# Altium PCB PCB4test.PcbDoc
Units mil, origin at the board's own origin, x right, y up, seen from the top; angles counter-clockwise.
Board outline 3937 x 3937 mil, 2 copper layers (Top Layer, Bottom Layer); 29 components, 33 nets, 121 pads, 0 vias.
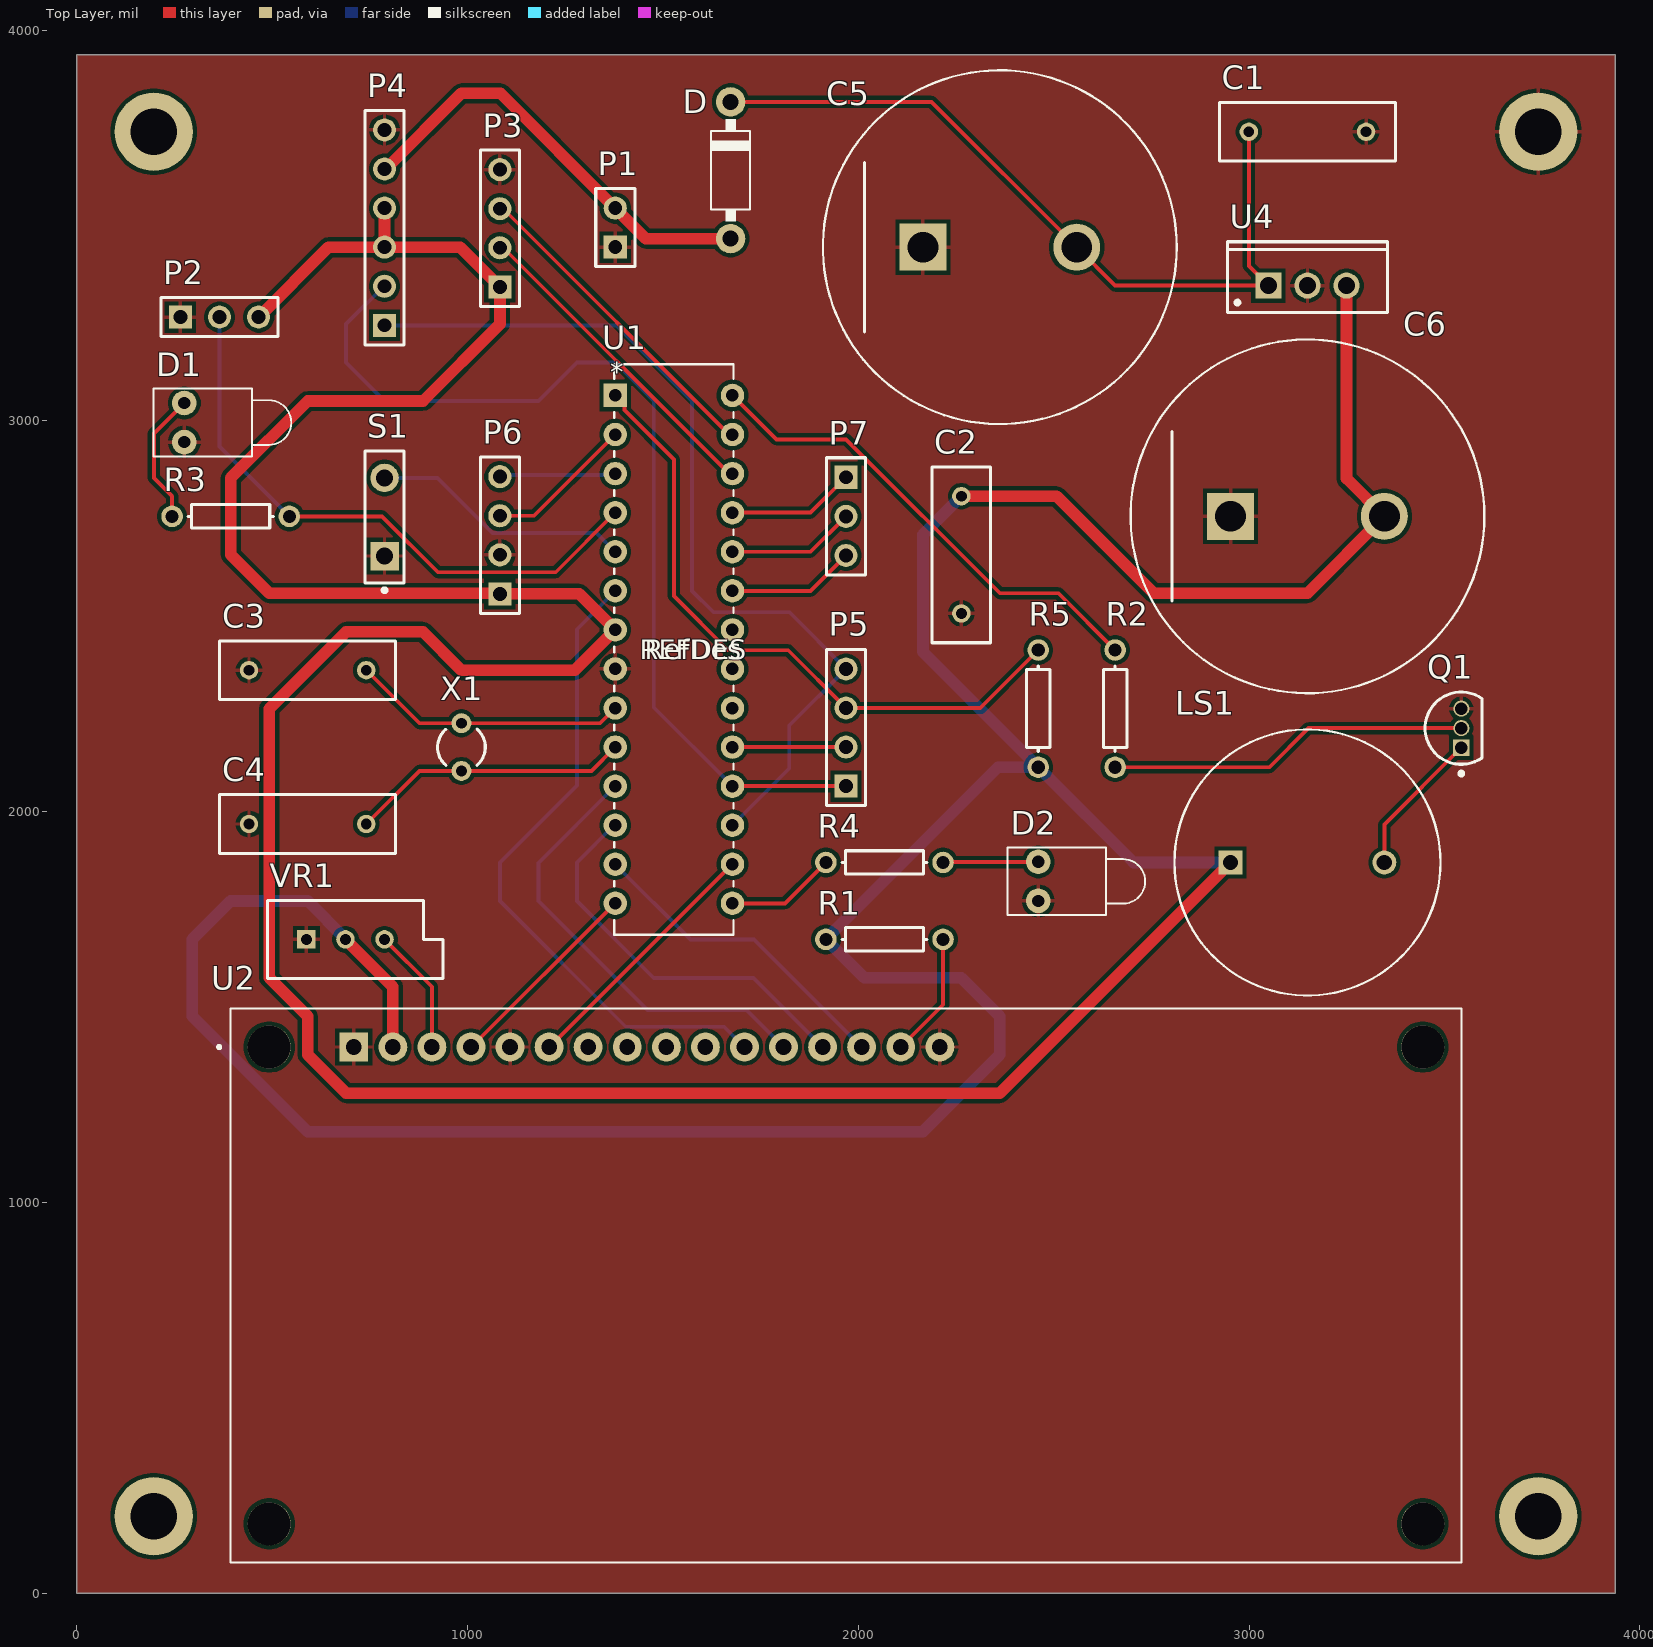
[diagram p0: Top Layer view]
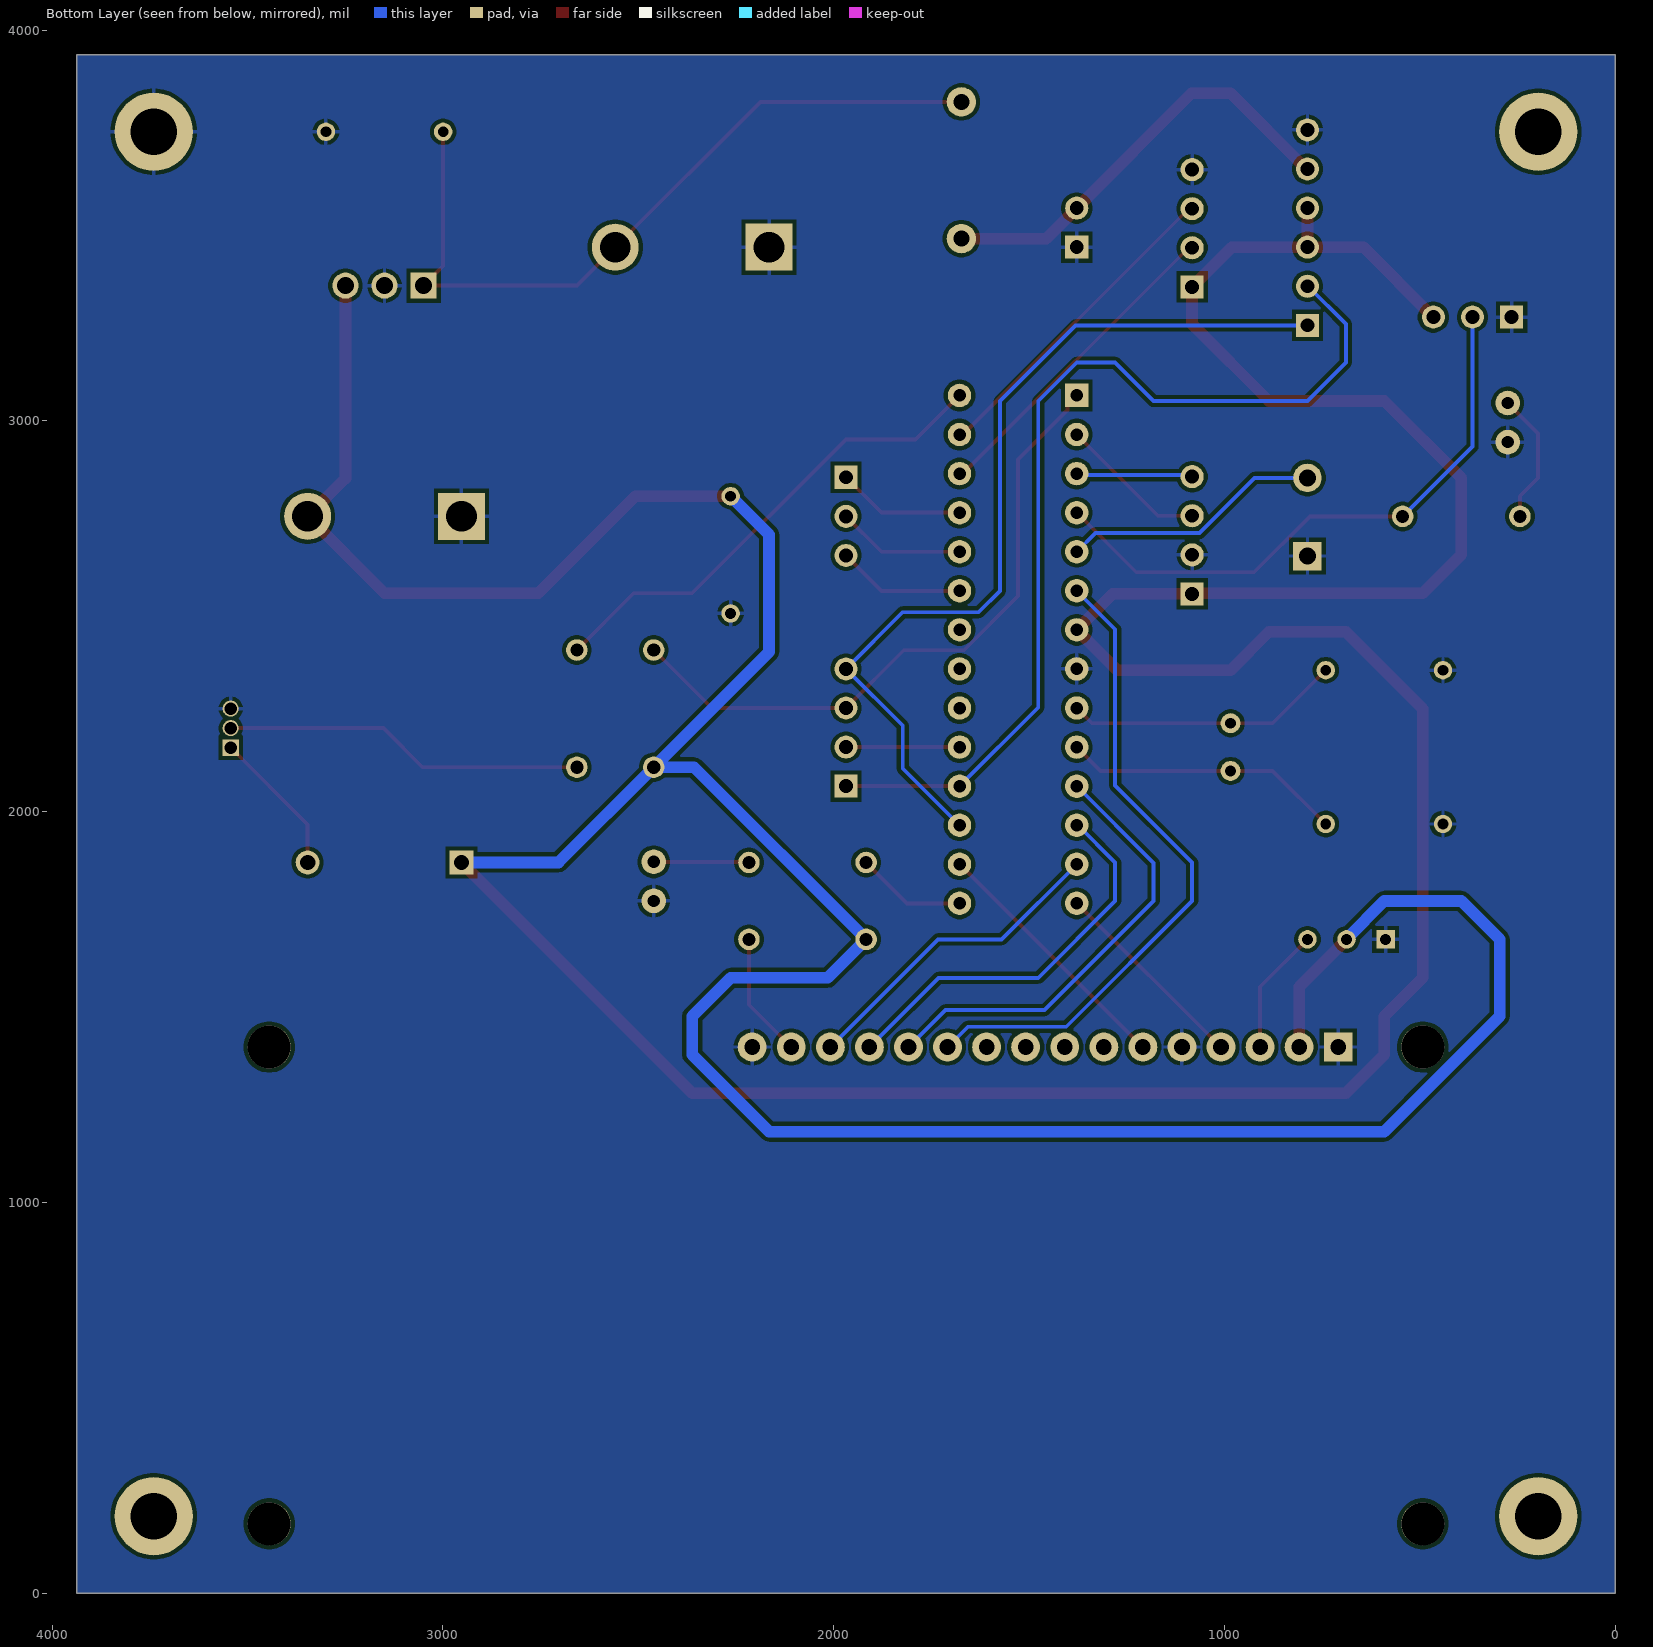
[diagram p1: Bottom Layer view, seen from below]

## Layer stack, top to bottom
Top Solder: solder mask 0.4, Solder Resist, Dk 3.5
Top Layer: signal copper 1.4
Dielectric 1: dielectric 12.6, FR-4, Dk 4.8
Bottom Layer: signal copper 1.4
Bottom Solder: solder mask 0.4, Solder Resist, Dk 3.5

## Board outline
0,0 3937,0 3937,3937 0,3937

## Design rules (kind name [scope] priority, off if disabled: settings)
Clearance [All] p1: gap=10 ignorepadtopadclearanceinfootprint=FALSE except(0: Arc-Hole Track-Hole SMDPad-Hole THPad-Hole Via-Hole Fill-Hole Poly-Hole Region-Hole Text-Hole; 5: Arc-SMDPad Track-SMDPad; 7: Arc-Arc Arc-Track Arc-Via Arc-Text Track-Track Track-Via Track-Text SMDPad-SMDPad SMDPad-THPad SMDPad-Via SMDPad-Text THPad-THPad THPad-Text Via-Via Via-Text Fill-Text Poly-Text Region-Text Text-Text)
HoleSize [All] p1: absolutevalues=TRUE maxlimit=115 minlimit=1 maxpercent=80.000 minpercent=20.000
MinimumSolderMaskSliver [All] p1: minsoldermaskwidth=0.5
PolygonConnect [All] p1: connectstyle=Relief reliefconductorwidth=10 reliefentries=4 polygonreliefangle="90 Angle" airgapwidth=10
RoutingVias [All] p1: holewidth=15.75 width=19.68 viastyle="Through Hole" minholewidth=7.87 minwidth=11.81 maxholewidth=200 maxwidth=200
SilkToSilkClearance [All] p1: silktosilkclearance=0
SilkToSolderMaskClearance [IsPad] p1: minsilkscreentomaskgap=0 clearancetoexposedcopper=TRUE
SolderMaskExpansion [All] p1: expansion=4 istentingtop=FALSE
Width Width_power [(InNet('+5') OR InNet('+12'))] p1: maxlimit=50 minlimit=20 preferedwidth=30 minimp=50.000000 maximp=50.000000 favimp=50.000000
Width [All] p2: maxlimit=50 minlimit=7 preferedwidth=10 minimp=50.000000 maximp=50.000000 favimp=50.000000
26 further rules are at their usual default settings.

## Classes and differential pairs
component class "COMPONENT BLOCKS 2": D1 LS1 P2 P3 P4 Q1 R2 R3
component class "COMPONENT BLOCKS 1": C1 C2 C5 C6 D P1 R1 U2 U4 VR1
component class ATmega328PU: C3 C4 D2 P5 P6 P7 R4 R5 S1 U1 X1

## Components (designator, comment, footprint, x,y, rotation, side; value= is the part's Value field where it differs from the comment)
C1 "Cap" RAD-0.3 3149.6,3740.15 r180 top value=22pF
C2 "Cap" RAD-0.3 2263.78,2657.47 r90 top value=22pF
C3 "Cap" RAD-0.3 590.55,2362.2 r0 top value=22pF
C4 "Cap" RAD-0.3 590.55,1968.5 r0 top value=22pF
C5 "1000uF" FP-SMR-P45-MFG 2362.2,3444.88 r0 top
C6 "470uF" FP-SMR-P45-MFG 3149.6,2755.9 r0 top
D "DIODE" DO-41 1673.22,3641.73 r90 top
D1 "LED1" LED-1 275,2995.97 r0 top
D2 "LED1" LED-1 2460.62,1821.65 r0 top
LS1 "PS1720P02" FP-PS1720P02-MFG 3149.6,1870.07 r0 top
P1 "12V" HDR1X2 1377.95,3444.88 r90 top
P2 "OIS" HDR1X3 265,3265.98 r0 top
P3 "UDM" HDR1X4 1082.68,3343.3 r90 top
P4 "DCMD" HDR1X6 787.4,3244.88 r90 top
P5 "MACH NAP HEADER" HDR1X4 1968.5,2065.35 r90 top
P6 "UART RADAR MONITOR" HDR1X4 1082.68,2557.47 r90 top
P7 "FREE HEADER" HDR1X3 1968.5,2855.9 r270 top
Q1 "BC547B" ONSC-TO-92-3-29-11 3543.3,2213.78 r90 top
R1 "Res1" AXIAL-0.3 2066.93,1673.22 r0 top value=100
R2 "Res1" AXIAL-0.3 2657.47,2263.78 r270 top value=330
R3 "Res1" AXIAL-0.3 393.7,2755.9 r0 top value=1K
R4 "Res1" AXIAL-0.3 2066.93,1870.07 r0 top value=1K
R5 "Res1" AXIAL-0.3 2460.62,2263.78 r270 top value=1K
S1 "SW-PB" SPST-2 787.4,2754.32 r90 top
U1 "ATMEGA328P-PU" 28P3_ATM 1377.95,3065.35 r0 top
U2 "LCD-16x2" MODULE_LCD-16X2 1968.5,787.4 r0 top
U4 "L7805ABV" TO220 3149.6,3346.45 r0 top
VR1 "RPot" VR5 687.4,1673.22 r0 top value=10K
X1 "XTAL" R38 984.25,2165.35 r0 top

## Footprints (in the part's own frame and the unit in brackets; to place one, negate y for a bottom-side part, rotate by r counter-clockwise, add the part's x,y. Pads: shape width x height; smd on the part's side, far side on the other; paste and mask are expansions set on the pad)
28P3_ATM [mil]
  rect 60x60 / inner round 60 / far side rect 60x60 hole 32 paste-30 mask+0: 1(0,0)
  round 60 hole 32 paste-30 mask+0: 2(0,-100) 3(0,-200) 4(0,-300) 5(0,-400) 6(0,-500) 7(0,-600) 8(0,-700) 9(0,-800) 10(0,-900) 11(0,-1000) 12(0,-1100) 13(0,-1200) 14(0,-1300) 15(300,-1300) 16(300,-1200) 17(300,-1100) 18(300,-1000) 19(300,-900) 20(300,-800) 21(300,-700) 22(300,-600) 23(300,-500) 24(300,-400) 25(300,-300) 26(300,-200) 27(300,-100) 28(300,0)
  silkscreen extent -2,-1380 302,80, body extent -5,-1375 314,75, height 205
AXIAL-0.3 [mm] "Axial Device, Thru-Hole; 2 Leads; 0.3 in Pin Spacing"
  round 1.4 hole 0.85: 1(-3.81,0) 2(3.81,0)
  silkscreen extent -2.77,-0.76 2.77,0.76
DO-41 [mil]
  round 75 hole 41: 1(-175,0) 2(175,0)
  silkscreen extent -130,-50 130,50
FP-PS1720P02-MFG [mm]
  rect 1.55x1.55 hole 1 paste-1000 mask+0: 1(-5,0)
  round 1.55 hole 1 paste-1000 mask+0: 2(5,0)
  silkscreen extent -8.65,-8.65 8.65,8.65, body extent -8.75,-8.75 8.75,8.75, height 0.25
FP-SMR-P45-MFG [mm]
  rect 3.05x3.05 hole 2 paste-1000 mask+0: 1(-5,0)
  round 3.05 hole 2 paste-1000 mask+0: 2(5,0)
  silkscreen extent -11.5,-11.5 11.5,11.5, body extent -11.6,-11.6 11.6,11.6, height 0.25
HDR1X2 [mm] "Connector; Header; 2 Position"
  rect 1.5x1.5 hole 0.9: 1(0,0)
  round 1.5 hole 0.9: 2(2.54,0)
  silkscreen extent -1.27,-1.27 3.81,1.27
HDR1X3 [mm] "Connector; Header; 3 Position"
  rect 1.5x1.5 hole 0.9: 1(0,0)
  round 1.5 hole 0.9: 2(2.54,0) 3(5.08,0)
  silkscreen extent -1.27,-1.27 6.35,1.27
HDR1X4 [mm] "Connector; Header; 4 Position"
  rect 1.5x1.5 hole 0.9: 1(0,0)
  round 1.5 hole 0.9: 2(2.54,0) 3(5.08,0) 4(7.62,0)
  silkscreen extent -1.27,-1.27 8.89,1.27
HDR1X6 [mm] "Connector; Header; 6 Position"
  rect 1.5x1.5 hole 0.9: 1(0,0)
  round 1.5 hole 0.9: 2(2.54,0) 3(5.08,0) 4(7.62,0) 5(10.16,0) 6(12.7,0)
  silkscreen extent -1.27,-1.27 13.97,1.27
LED-1 [mm] "LED; 2 Leads"
  round 1.6 hole 0.8: 1(0,1.27) 2(0,-1.27)
  silkscreen extent -2,-2.2 6.95,2.2
MODULE_LCD-16X2 [mm]
  rect 1.88x1.88 / inner round 1.88 / far side rect 1.88x1.88 hole 1.016: 1(-32,15.5)
  round 1.88 hole 1.016: 2(-29.46,15.5) 3(-26.92,15.5) 4(-24.38,15.5) 5(-21.84,15.5) 6(-19.3,15.5) 7(-16.76,15.5) 8(-14.22,15.5) 9(-11.68,15.5) 10(-9.14,15.5) 11(-6.6,15.5) 12(-4.06,15.5) 13(-1.52,15.5) 14(1.02,15.5) 15(3.56,15.5) 16(6.1,15.5)
  round 2.8 hole 2.8 unplated: ""(-37.5,-15.5) ""(-37.5,15.5) ""(37.5,-15.5) ""(37.5,15.5)
  silkscreen extent -40.85,-18 40,18, body extent -40,-18 40,18, height 10.2
ONSC-TO-92-3-29-11 [mm] "TO, 3-Leads, Body Dia 4.7mm, Pitch 1.27mm"
  rect 1.05x1.05 hole 0.8: 1(-1.27,0)
  round 1.05 hole 0.8: 2(0,0) 3(1.27,0)
  silkscreen extent -3.07,-1.34 2.35,2.35, body extent -2.35,-1.33 2.36,2.36, height 7.87
R38 [mm] "Crystal, Thru-Hole; 2 Leads; Body 3.1 x 8.2 mm (Dia.xH)"
  round 1.3 hole 0.7: 1(0,1.55) 2(0,-1.55)
  silkscreen extent -1.55,-1.19 1.55,1.17
RAD-0.3 [mm] "Radial Cap, Thru-Hole; 2 Leads; 0.3 in Pin Spacing"
  round 1.2 hole 0.7: 1(-3.81,0) 2(3.81,0)
  silkscreen extent -5.71,-1.91 5.72,1.91
SPST-2 [mm] "Switch; 2 Leads"
  rect 1.85x1.85 hole 1.1: 1(-2.54,0)
  round 1.85 hole 1.1: 2(2.54,0)
  silkscreen extent -4.89,-1.27 4.28,1.27
TO220 [mm] "TO, Thru-Hole, Vertical, Heatsink Mounted; 3 In-Line Leads; Pitch 2.54 mm"
  rect 1.7x1.7 hole 1.1: 1(-2.54,0)
  round 1.7 hole 1.1: 2(0,0) 3(2.54,0)
  silkscreen extent -5.2,-1.75 5.2,2.85, body extent -5.25,-1.8 5.25,2.9, height 19.7
VR5 [mm] "Thru-Hole; 3 Leads"
  rect 1.2x1.2 hole 0.7: 1(-2.54,0)
  round 1.2 hole 0.7: 2(0,0) 3(2.54,0)
  silkscreen extent -5.08,-2.54 6.35,2.54

## Part data
C1 C2 C3 C4: "Capacitor", LatestRevisionDate=17-Jul-2002, LatestRevisionNote="Re-released for DXP Platform.", PackageDescription="Radial Cap, Thru-Hole; 2 Leads; 0.3 in Pin Spacing", PackageReference=RAD-0.3, Published=8-Jun-2000, Publisher="Altium Limited"
C5: library part CMP-33768-000007-1, "CAP ALUM 270UF 20% 450V SNAP", Case/Package=Radial, Max Operating Temperature=85°C, Min Operating Temperature=-25°C, Package Quantity=200, Ripple Current=1.88A, Tolerance=20%, Voltage Rating=450V, Capacitance=1000uF, Height - Seated (Max)=1.87inch, Lead Pitch=0.394inch, Life (Hours)=2000Hour, Mount="Through Hole", Packaging=Bulk, Polarity=Polar
C6: library part CMP-33768-000007-1, "CAP ALUM 270UF 20% 450V SNAP", Capacitance=1000uF, Case/Package=Radial, Max Operating Temperature=85°C, Min Operating Temperature=-25°C, Package Quantity=200, Ripple Current=1.88A, Tolerance=20%, Voltage Rating=450V, Height - Seated (Max)=1.87inch, Lead Pitch=0.394inch, Life (Hours)=2000Hour, Mount="Through Hole", Packaging=Bulk, Polarity=Polar
D: library part DIP-DIODE-50V-1A(DO-41), "Diode Standard 50V 1A Through Hole DO-41", Package="DO-41 Comchip", Availability=Unavailable, MF="Comchip Technology", MP=1N4001-G, Price=None, SnapEDA_Link=https://www.snapeda.com/parts/1N4001-G/Comchip%20Technology/view-part/106354/?ref=snap
D1 D2: "Typical RED GaAs LED", LatestRevisionDate=08-Jul-2005, LatestRevisionNote="Mech Layer 1 removed.", PackageDescription="LED; 2 Leads", PackageReference=LED-1, Published=8-Jun-2000, Publisher="Altium Limited"
LS1: library part CMP-08413-000001-1, "AUDIO PIEZO TRANSDUCER 30V TH", Frequency=2kHz, Manufacturer="TDK Corporation", Package=0, Temperature="-10°C to +70°C", Temperature Range High=+70°C, Temperature Range Low=-10°C, Automotive=No, Category=Speak, ComponentLink2Description=Datasheet, ComponentLink2URL=https://product.tdk.com/info/en/catalog/datasheets/piezoelectronic_buzzer_ps_en.pdf, Device Class L1=Electromechanical, Device Class L2="Audio Products", Device Class L3=Buzzers, Digikey Description="AUDIO PIEZO TRANSDUCER 30V TH", Height=8.3mm, Lead Free=Yes, Manufacturer Part Number=PS1720P02, Mouser Description="Audio Indicators & Alerts Round 17mmx8mm 2 kHz Vin=3V", Octopart=https://octopart.com/ps1720p02-tdk-154429, RoHS=TRUE, Standoff Height=0.5mm
P1: library part "Header 2", "Header, 2-Pin", LatestRevisionDate=17-Jul-2002, LatestRevisionNote="Re-released for DXP Platform.", Publisher="Altium Limited"
P2 P7: library part "Header 3", "Header, 3-Pin", LatestRevisionDate=17-Jul-2002, LatestRevisionNote="Re-released for DXP Platform.", Publisher="Altium Limited"
P3 P5 P6: library part "Header 4", "Header, 4-Pin", LatestRevisionDate=17-Jul-2002, LatestRevisionNote="Re-released for DXP Platform.", Publisher="Altium Limited"
P4: library part "Header 6", "Header, 6-Pin", LatestRevisionDate=17-Jul-2002, LatestRevisionNote="Re-released for DXP Platform.", Publisher="Altium Limited"
Q1: library part CMP-1048-01467-1, "Amplifier Transistor, NPN Silicon, 3-Pin TO-92, Bulk Box", Manufacturer="On Semiconductor", ComponentLink1Description="Manufacturer URL", ComponentLink1URL=http://www.onsemi.com/, ComponentLink2Description=Datasheet, ComponentLink2URL=http://www.onsemi.com/pub_link/Collateral/BC546-D.PDF, ComponentLink3Description="Package Specification", ComponentLink3URL=http://www.onsemi.cn/pub_link/Collateral/2N6426-D.PDF, DatasheetVersion="Rev. 7", fT Min (MHz)=150, IC Continuous (A)=0.1, Mounting Technology="Through Hole", PackageDescription="3-Pin Transistor Outline, Body 4.825 x 3.685 mm, Pitch 1.27 mm", PackageReference=TO-92-3-29-11_AM_SL, PackageVersion="Rev. AM", Packing="Bulk Box", PartNumber=BC547B, Polarity=NPN, RoHS=FALSE
R1 R2 R3 R4 R5: "Resistor", LatestRevisionDate=17-Jul-2002, LatestRevisionNote="Re-released for DXP Platform.", PackageDescription="Axial Device, Thru-Hole; 2 Leads; 0.3 in Pin Spacing", PackageReference=AXIAL-0.3, Published=8-Jun-2000, Publisher="Altium Limited"
S1: "Switch", LatestRevisionDate=17-Jul-2002, LatestRevisionNote="Re-released for DXP Platform.", PackageDescription="Switch; 2 Leads", PackageReference=SPST-2, Published=24-Mar-1999, Publisher="Altium Limited"
U1: "Description", Manufacturer_Name=Microchip, Copyright="Copyright (C) 2025 Ultra Librarian. All rights reserved.", Manufacturer_Part_Number=ATMEGA328P-PU, RefDes=RefDes, Type=Type
U2: library part LCD-16X2, "Display Development Tools 20x4 Black on Green Char LCD w Backlight", Package=None, Check_prices=https://www.snapeda.com/parts/LCD-16X2/Gravitech/view-part/?ref=eda, MF=Gravitech, MP=LCD-16X2, SnapEDA_Link=https://www.snapeda.com/parts/LCD-16X2/Gravitech/view-part/?ref=snap
U4: library part CMP-0244-00485-1, "Positive Voltage Regulator, 5V, 3-Pin TO-220", ComponentLink1Description="Manufacturer URL", ComponentLink1URL=http://www.st.com, ComponentLink2Description=Datasheet, ComponentLink2URL=http://www.st.com/internet/com/TECHNICAL_RESOURCES/TECHNICAL_LITERATURE/DATASHEET/CD00000444.pdf, ComponentLink3Description="Package Specification", ComponentLink3URL=http://www.st.com/internet/com/TECHNICAL_RESOURCES/TECHNICAL_LITERATURE/PACKAGE_INFORMATION/CD00004649.pdf, DatasheetVersion=16/11/2011, PackageDescription="TO, Thru-Hole, Vertical, Heatsink Mounted; 3 In-Line Leads; Pitch 2.54 mm", PackageReference=TO220, PackageVersion=ver3.0
VR1: "Potentiometer", LatestRevisionDate=17-Jul-2002, LatestRevisionNote="Re-released for DXP Platform.", PackageDescription="Variable Resistor, Thru-Hole; 3 Leads", PackageReference=VR5, Published=8-Jun-2000, Publisher="Altium Limited", Set Position=0.5, Sim Note="Enter the Resistance value and the set point into parameter fields."
X1: "Crystal Oscillator", LatestRevisionDate=17-Jul-2002, LatestRevisionNote="Re-released for DXP Platform.", PackageDescription="Crystal, Thru-Hole; 2 Leads; Body 3.1 x 8.2 mm (Dia.xH)", PackageReference=R38, Published=8-Jun-2000, Publisher="Altium Limited"

## Free pads (board coordinates)
  round 200 hole 120: 1(196.85,3740.15) 2(196.85,196.85) 3(3740.15,196.85) 4(3740.15,3740.15)

## Nets (pads, with @x,y where several pads share a name; then routed paths per layer and width w, separated by ;. In a path a pad name is that pad's centre, name@x,y a point inside that pad or via, vN(x,y) a via of type N, cw(c..) or ccw(c..) an arc to the next point about the centre after c; other vN are vias at no path point)
+5: C2.2 C6.2 LS1.1 P2.3 P3.1 P4.3 P4.4 P6.1 R1.1 R5.2 U1.7 U2.2 U4.3 VR1.2 | length 15634
  Top Layer w30: P2.3 643.9,3444.88 P4.3 ; VR1.2 808.66,1551.97 U2.2 ; P4.4 P4.3 ; C2.2 2507.47,2807.47 2755.9,2559.05 3149.6,2559.05 C6.2 3249.6,2852.75 U4.3 ; LS1.1 2362.2,1279.53 688.97,1279.53 590.55,1377.95 590.55,1476.38 492.12,1574.8 492.12,2263.78 688.97,2460.62 885.83,2460.62 984.25,2362.2 1274.8,2362.2 U1.7 1285.82,2557.47 P6.1 1081.1,2559.05 492.12,2559.05 393.7,2657.47 393.7,2854.32 590.55,3051.18 885.83,3051.18 1082.68,3248.02 P3.1 981.1,3444.88 P4.3
  Bottom Layer w30: VR1.2 687.4,1674.8 590.55,1771.65 393.7,1771.65 295.28,1673.22 295.28,1476.38 590.55,1181.1 2165.35,1181.1 2362.2,1377.95 2362.2,1476.38 2263.78,1574.8 2015.35,1574.8 R1.1 2357.47,2113.78 R5.2 ; C2.2 2165.35,2709.05 2165.35,2409.05 R5.2 ; LS1.1 2704.32,1870.07 R5.2
+12: D.1 P1.2 P4.5 | length 1120.1
  Top Layer w30: P4.5 790.55,3644.88 984.25,3838.57 1084.25,3838.57 P1.2 1456.1,3466.73 D.1
crystal1: C3.2 U1.9 X1.1 | length 709.8
  Top Layer w10: C3.2 876.38,2226.37 X1.1 1338.97,2226.37 U1.9
crystal2: C4.2 U1.10 X1.2 | length 718.9
  Top Layer w10: C4.2 876.38,2104.33 X1.2 1316.93,2104.33 U1.10
GND: C1.1 C2.1 C3.1 C4.1 C5.1 C6.1 D1.2 D2.2 P1.1 P2.1 P3.4 P4.6 P6.2 pad.4 Q1.3 S1.1 U1.8 U2.1 U2.5 U2.16 U4.2 VR1.1
LED_ACTIVE: R4.1 U1.15 | length 282.4
  Top Layer w10: U1.15 1812.2,1765.35 R4.1
NetC1_2: C1.2 C5.2 D.2 U4.1 | length 1985.6
  Top Layer w10: D.2 2187.2,3816.73 C5.2 2657.48,3346.45 U4.1 2999.6,3396.45 C1.2
NetD1_1: D1.1 R3.1 | length 341.9
  Top Layer w10: R3.1 243.7,2807.47 196.85,2854.32 196.85,2967.82 D1.1
NetD2_1: D2.1 R4.2 | length 244.4
  Top Layer w10: R4.2 2217.71,1870.86 2459.84,1870.86 D2.1
NetLS1_2: LS1.2 Q1.1 | length 375.2
  Top Layer w10: LS1.2 3346.45,1966.93 Q1.1
NetP2_2: P2.2 R3.2 U1.4 | length 1540.7
  Top Layer w10: R3.2 781.02,2755.9 923.98,2612.95 1225.55,2612.95 U1.4
  Bottom Layer w10: P2.2 365,2934.6 R3.2
NetP3_2: P3.2 U1.26 | length 834.7
  Top Layer w10: P3.2 1091.34,3443.3 1669.29,2865.35 U1.26
NetP3_3: P3.3 U1.27 | length 834.7
  Top Layer w10: P3.3 1091.34,3543.3 1669.29,2965.35 U1.27
NetQ1_2: Q1.2 R2.2 | length 927.2
  Top Layer w10: R2.2 3052.25,2113.78 3152.25,2213.78 Q1.2
NetR1_2: R1.2 U2.15 | length 320.4
  Top Layer w10: U2.15 2216.93,1505.9 R1.2
NetR2_1: R2.1 U1.28 | length 1249.4
  Top Layer w10: U1.28 1790.55,2952.75 1968.5,2952.75 2362.2,2559.05 2512.2,2559.05 R2.1
NetU1_6: U1.6 U2.11 | length 1696.9
  Bottom Layer w10: U1.6 1279.53,2466.93 1279.53,2066.93 1082.68,1870.07 1082.68,1771.65 1404.69,1449.64 1656.66,1449.64 U2.11
NetU1_11: U1.11 U2.12 | length 1157.7
  Bottom Layer w10: U1.11 1181.1,1868.5 1181.1,1771.65 1460.41,1492.34 1713.95,1492.34 U2.12
NetU1_12: U1.12 U2.13 | length 1020.4
  Bottom Layer w10: U1.12 1374.8,1965.35 1279.53,1870.07 1279.53,1771.65 1476.38,1574.8 1731.49,1574.8 U2.13
NetU1_13: U1.13 U2.14 | length 824.4
  Bottom Layer w10: U1.13 1570.07,1673.22 1733.07,1673.22 U2.14
NetU1_14: U1.14 U2.4 | length 521.6
  Top Layer w10: U2.4 1009.45,1397.64 1377.16,1765.35 U1.14
NetU1_16: U1.16 U2.6 | length 663
  Top Layer w10: U2.6 1209.45,1397.64 1677.16,1865.35 U1.16
NetU2_3: U2.3 VR1.3 | length 325.8
  Top Layer w10: VR1.3 908.66,1551.97 U2.3
PB3_MOSI: P4.1 P5.4 U1.17 | length 2350.6
  Bottom Layer w10: P4.1 1381.1,3244.88 1574.8,3051.18 1574.8,2564.91 1629.36,2510.35 1823.5,2510.35 P5.4 1823.32,2220.17 1823.32,2110.72 U1.17
PB4_MISO: P4.2 P5.1 U1.18 | length 2506.5
  Top Layer w10: U1.18 P5.1
  Bottom Layer w10: P4.2 785.83,3344.88 688.97,3248.02 688.97,3149.6 787.4,3051.18 1181.1,3051.18 1279.53,3149.6 1377.95,3149.6 1476.38,3051.18 1476.38,2266.93 U1.18
PB5_SCK: P5.2 U1.19 | length 290.6
  Top Layer w10: U1.19 P5.2
PC0: P7.3 U1.23 | length 328.1
  Top Layer w10: U1.23 1877.95,2565.35 P7.3
PC1: P7.2 U1.24 | length 328.1
  Top Layer w10: U1.24 1877.95,2665.35 P7.2
PC2: P7.1 U1.25 | length 328.1
  Top Layer w10: U1.25 1877.95,2765.35 P7.1
PC6_RS: P5.3 R5.1 U1.1 | length 1688.5
  Top Layer w10: U1.1 1401.47,3041.83 1401.47,3027.66 1527.95,2901.17 1527.95,2551.71 1666.44,2413.22 1820.63,2413.22 P5.3 2312.2,2265.35 R5.1
RESET_BUTTON: S1.2 U1.5 | length 668.8
  Bottom Layer w10: S1.2 922.85,2854.32 1064.23,2712.95 1330.35,2712.95 U1.5
RX: P6.4 U1.3 | length 298.5
  Bottom Layer w10: P6.4 1086.61,2861.41 1374.01,2861.41 U1.3
TX: P6.3 U1.2 | length 381.4
  Top Layer w10: P6.3 1170.07,2757.47 U1.2
pads on no net: U1.20 U1.21 U1.22 U2. U2.7 U2.8 U2.9 U2.10

## Polygon pours and split planes (outlines as drawn)
GND on Top Layer "GND_L01_P000" (solid, remove dead copper, pour order 0): 0,3937 3937,3937 3937,0 0,0
GND on Bottom Layer "GND_L02_P001" (solid, remove dead copper, pour order 1): 0,3937 3937,3937 3937,0 0,0

## Text inside footprints (layer, text, board x,y; h text height)
U1: Top Overlay "REFDES" at 1440.45,2390.35 h50; Top Overlay "RefDes" at 1452.95,2390.35 h50; Top Overlay "*" at 1365.45,3100.35 h50; Top 3D Body "RefDes2" at 1440.45,2390.35 h50; Top 3D Body "*" at 1377.95,3040.35 h50